# Altium PCB PCB1.PcbDoc (part 9 of 12)
Units mm, origin at the board's own origin, x right, y up, seen from the top; angles counter-clockwise.
Board outline 100 x 100 mm, 6 copper layers (Top Layer, Int1 (GND), Int2 (Sign), Int3 (Sign), Int4 (PWR), Bottom Layer), stack 1.538 mm thick; 614 components, 712 nets, 3014 pads, 1096 vias.
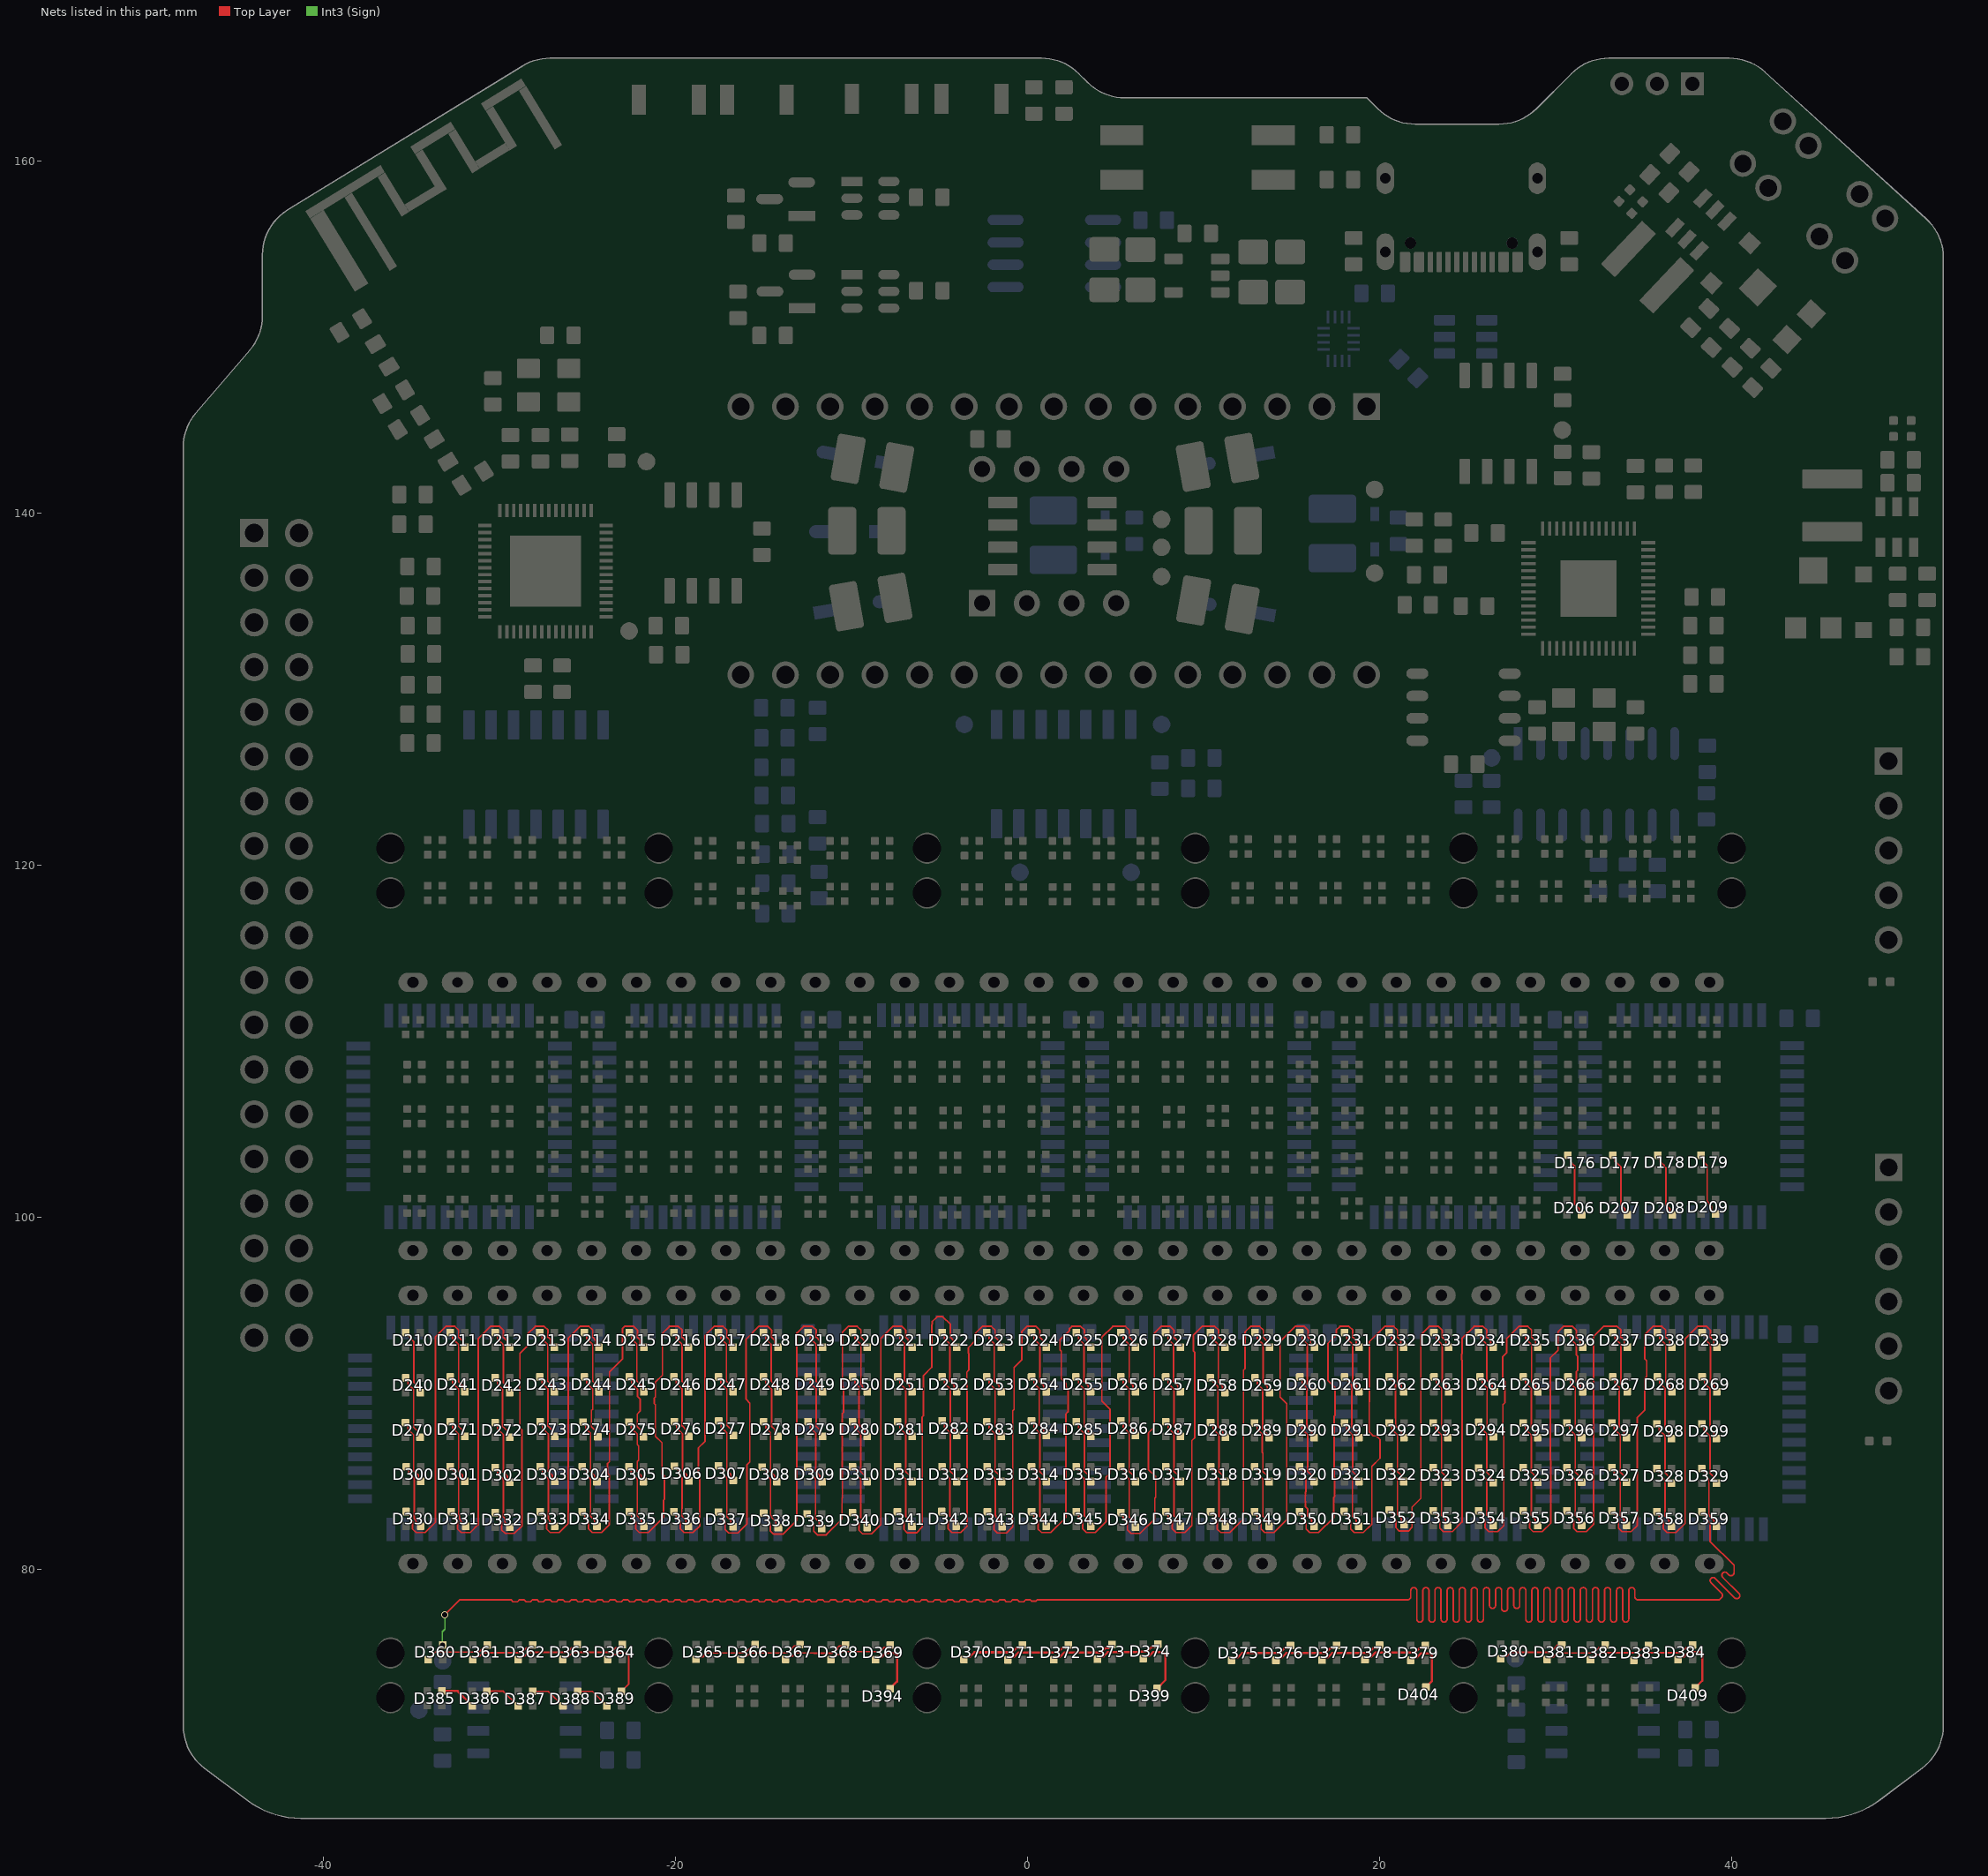
[diagram p12: the nets of this part, all layers, seen from the top]

## Via types
v1: diameter 0.4, hole 0.3, Top Layer to Bottom Layer, tented both sides, 1087 vias
v2: diameter 0.4, hole 0.3, Top Layer to Bottom Layer, 6 vias
v3: diameter 0.4, hole 0.3, Top Layer to Bottom Layer, tented top, 2 vias
v4: diameter 0.6, hole 0.5, Top Layer to Bottom Layer, 1 vias

## Nets (pads, with @x,y where several pads share a name; then routed paths per layer and width w, separated by ;. In a path a pad name is that pad's centre, name@x,y a point inside that pad or via, vN(x,y) a via of type N, cw(c..) or ccw(c..) an arc to the next point about the centre after c; other vN are vias at no path point) (continued)
NetD176_1: D176.1 D206.4 | length 3.7
  Top Layer w0.09: D176.1@30.69,103.523 30.827,103.385 30.827,103.171 31.063,102.935 31.063,100.763 31.332,100.494 31.332,100.313 D206.4@31.465,100.18
NetD177_1: D177.1 D207.4 | length 3.7
  Top Layer w0.09: D177.1@33.24,103.523 33.377,103.385 33.377,103.171 33.703,102.846 33.703,100.717 33.925,100.494 33.925,100.282 D207.4@34.027,100.18
NetD178_1: D178.1 D208.4 | length 3.7
  Top Layer w0.09: D178.1@35.79,103.533 35.927,103.395 35.927,103.181 36.07,103.039 36.15,102.959 36.15,102.904 36.26,102.794 36.26,100.717 36.482,100.494 36.482,100.285 D208.4@36.577,100.19
NetD179_1: D179.1 D209.4 | length 3.7
  Top Layer w0.09: D179.1@38.24,103.533 38.377,103.395 38.377,103.181 38.6,102.959 38.6,100.932 38.71,100.822 38.71,100.767 38.84,100.637 38.84,100.423 39.027,100.235 D209.4@39.027,100.19
NetD210_1: D210.1 D240.4 | length 3.7
  Top Layer w0.09: D210.1@-35.332,93.436 -35.067,93.171 -35.067,93.116 -34.877,92.926 -34.877,90.627 -34.655,90.404 -34.655,90.219 D240.4@-34.494,90.058
NetD211_1: D211.1 D241.4 | length 3.8
  Top Layer w0.09: D211.1@-32.847,93.431 -32.82,93.431 -32.67,93.281 -32.67,93.099 -32.337,92.767 -32.337,90.677 -32.115,90.454 -32.115,90.238 D241.4@-31.93,90.053
NetD211_3: D211.4 D330.1 | length 15.9
  Top Layer w0.09: D330.1@-35.324,83.288 -35.044,83.008 -35.044,82.794 -34.964,82.714 -34.964,82.312 -34.75,82.098 -34.238,82.098 -33.651,82.685 -33.651,93.224 -33.064,93.811 -32.551,93.811 -32.337,93.597 -32.337,93.195 -32.115,92.972 -32.115,92.791 D211.4@-32.141,92.765
NetD212_1: D212.1 D242.4 | length 3.8
  Top Layer w0.09: D212.1@-30.347,93.381 -30.23,93.381 -30.13,93.281 -30.13,93.099 -29.797,92.767 -29.797,90.627 -29.575,90.404 -29.575,90.148 D242.4@-29.43,90.003
NetD212_3: D212.4 D331.1 | length 15.9
  Top Layer w0.09: D331.1@-32.76,83.283 -32.48,83.003 -32.48,82.789 -32.4,82.709 -32.4,82.307 -32.187,82.093 -31.674,82.093 -31.227,82.54 -31.227,93.107 -30.524,93.811 -30.011,93.811 -29.797,93.597 -29.797,93.195 -29.575,92.972 -29.575,92.768 D212.4@-29.583,92.76
NetD213_1: D213.1 D243.4 | length 3.8
  Top Layer w0.09: D213.1@-27.797,93.431 -27.74,93.431 -27.59,93.281 -27.59,93.099 -27.273,92.782 -27.273,90.692 -27.035,90.454 -27.035,90.208 D243.4@-26.88,90.053
NetD213_3: D213.4 D332.1 | length 16.1
  Top Layer w0.09: D332.1@-30.26,83.233 -29.98,82.953 -29.98,82.739 -29.9,82.659 -29.9,82.257 -29.687,82.043 -29.174,82.043 -28.738,82.479 -28.738,87.915 -28.851,88.029 -28.851,88.637 -28.85,88.638 -28.85,90.403 -28.853,90.405 -28.853,92.268 -28.418,92.703 -28.418,93.376 -27.984,93.811 -27.471,93.811 -27.257,93.597 -27.257,93.195 -27.083,93.02 D213.4@-27.083,92.71
NetD214_1: D214.1 D244.4 | length 3.5
  Top Layer w0.09: D214.1@-25.12,93.351 -25.05,93.281 -25.05,93.099 -24.723,92.772 -24.723,90.682 -24.495,90.454 -24.495,90.098 D244.4@-24.48,90.083
NetD214_3: D214.4 D333.1 | length 15.9
  Top Layer w0.09: D333.1@-27.71,83.283 -27.43,83.003 -27.43,82.789 -27.35,82.709 -27.35,82.654 -27.338,82.642 -27.338,82.295 -27.137,82.093 -26.624,82.093 -26.102,82.615 -26.102,93.153 -25.444,93.811 -24.931,93.811 -24.717,93.597 -24.717,93.195 -24.533,93.01 D214.4@-24.533,92.76
NetD215_1: D215.1 D245.4 | length 3.8
  Top Layer w0.09: D215.1@-22.747,93.461 -22.69,93.461 -22.51,93.281 -22.51,93.099 -22.207,92.797 -22.207,90.707 -21.955,90.454 -21.955,90.208 D245.4@-21.83,90.083
NetD215_3: D215.4 D334.1 | length 16
  Top Layer w0.09: D334.1@-25.31,83.283 -25.173,83.145 -25.173,82.931 -24.95,82.709 -24.95,82.307 -24.737,82.093 -24.224,82.093 -23.783,82.534 -23.783,85.373 -23.877,85.467 -23.877,86.016 -23.77,86.123 -23.77,91.213 -23.031,91.952 -23.031,93.683 -22.904,93.811 -22.391,93.811 -22.177,93.597 -22.177,93.195 -22.017,93.035 D215.4@-22.017,92.76
NetD216_1: D216.1 D246.4 | length 3.7
  Top Layer w0.09: D216.1@-20.154,93.498 -19.97,93.313 -19.97,93.099 -19.637,92.767 -19.637,90.677 -19.415,90.454 -19.415,90.241 D246.4@-19.294,90.12
NetD216_3: D216.4 D335.1 | length 16.4
  Top Layer w0.09: D335.1@-22.647,83.283 -22.51,83.145 -22.51,82.931 -22.275,82.697 -22.275,82.295 -22.074,82.093 -21.561,82.093 -20.697,82.957 -20.697,83.932 -20.641,83.988 -20.641,85.297 -20.785,85.442 -20.785,87.199 -21.157,87.571 -21.157,89.358 -21.223,89.424 -21.223,89.732 -21.157,89.798 -21.157,90.638 -20.76,91.035 -20.76,93.414 -20.364,93.811 -19.851,93.811 -19.637,93.597 -19.637,93.195 -19.447,93.005 D216.4@-19.447,92.76
NetD217_1: D217.1 D247.4 | length 3.8
  Top Layer w0.09: D217.1@-17.638,93.522 -17.43,93.313 -17.43,93.099 -17.123,92.792 -17.123,90.702 -16.875,90.454 -16.875,90.273 -16.746,90.144 D247.4@-16.734,90.144
NetD217_3: D217.4 D336.1 | length 15.9
  Top Layer w0.09: D336.1@-20.11,83.283 -19.973,83.145 -19.973,82.931 -19.738,82.697 -19.738,82.295 -19.536,82.093 -19.024,82.093 -18.634,82.483 -18.634,85.353 -18.717,85.436 -18.717,86.9 -18.345,87.272 -18.345,93.289 -17.824,93.811 -17.311,93.811 -17.097,93.597 -17.097,93.195 -16.933,93.03 D217.4@-16.933,92.76
NetD218_1: D218.1 D248.4 | length 3.8
  Top Layer w0.09: D218.1@-15.172,93.448 -15.057,93.448 -14.89,93.281 -14.89,93.099 -14.58,92.789 -14.58,90.699 -14.335,90.454 -14.335,90.15 D248.4@-14.255,90.07
NetD218_3: D218.4 D337.1 | length 16.1
  Top Layer w0.09: D337.1@-17.567,83.26 -17.339,83.032 -17.287,82.98 -17.287,82.766 -17.195,82.674 -17.195,82.272 -16.994,82.07 -16.481,82.07 -15.952,82.599 -15.952,85.958 -15.793,86.118 -15.793,89.451 -16.005,89.663 -16.005,93.089 -15.284,93.811 -14.771,93.811 -14.557,93.597 -14.557,93.195 -14.39,93.027 D218.4@-14.39,92.737
NetD219_1: D219.1 D249.4 | length 3.8
  Top Layer w0.09: D219.1@-12.6,93.453 -12.522,93.453 -12.35,93.281 -12.35,93.099 -12.018,92.768 -12.018,90.677 -11.795,90.454 -11.795,90.241 D249.4@-11.683,90.128
NetD219_3: D219.4 D338.1 | length 16.1
  Top Layer w0.09: D338.1@-15.006,83.194 -14.726,82.914 -14.726,82.7 -14.634,82.608 -14.634,82.206 -14.432,82.004 -13.92,82.004 -13.121,82.802 -13.121,87.898 -13.119,87.899 -13.119,93.435 -12.744,93.811 -12.231,93.811 -12.017,93.597 -12.017,93.195 -11.828,93.005 D219.4@-11.828,92.671
NetD220_1: D220.1 D250.4 | length 3.8
  Top Layer w0.09: D220.1@-10.047,93.461 -9.99,93.461 -9.81,93.281 -9.81,93.099 -9.477,92.767 -9.477,90.518 -9.397,90.438 -9.397,90.383 D250.4@-9.13,90.116
NetD220_3: D220.4 D339.1 | length 16.2
  Top Layer w0.09: D339.1@-12.534,83.157 -12.254,82.877 -12.254,82.663 -12.162,82.571 -12.162,82.169 -11.96,81.967 -11.448,81.967 -10.551,82.864 -10.551,84.055 -10.529,84.076 -10.529,85.267 -10.547,85.285 -10.547,88.838 -10.469,88.917 -10.469,90.329 -10.534,90.395 -10.534,93.48 -10.204,93.811 -9.691,93.811 -9.477,93.597 -9.477,93.195 -9.287,93.005 D220.4@-9.287,92.634
NetD221_1: D221.1 D251.4 | length 3.8
  Top Layer w0.09: D221.1@-7.494,93.461 -7.45,93.461 -7.27,93.281 -7.27,93.099 -7.009,92.838 -7.009,90.748 -6.715,90.454 -6.715,90.241 D251.4@-6.577,90.103
NetD221_3: D221.4 D340.1 | length 16
  Top Layer w0.09: D340.1@-9.964,83.217 -9.684,82.937 -9.684,82.723 -9.592,82.631 -9.592,82.229 -9.39,82.027 -8.878,82.027 -8.348,82.556 -8.348,93.126 -7.664,93.811 -7.151,93.811 -6.937,93.597 -6.937,93.195 -6.786,93.044 D221.4@-6.786,92.694
NetD222_1: D222.1 D252.4 | length 3.8
  Top Layer w0.09: D222.1@-4.954,93.461 -4.91,93.461 -4.73,93.281 -4.73,93.099 -4.423,92.792 -4.423,90.702 -4.175,90.454 -4.175,90.221 D252.4@-4.037,90.083
NetD222_3: D222.4 D341.1 | length 16.9
  Top Layer w0.09: D341.1@-7.41,83.273 -7.13,82.993 -7.13,82.779 -7.038,82.687 -7.038,82.285 -6.836,82.083 -6.324,82.083 -5.99,82.417 -5.99,87.903 -6.006,87.919 -6.006,88.659 -5.924,88.741 -5.924,91.018 -5.454,91.488 -5.454,93.909 -5.423,93.94 -5.423,94.091 -5.15,94.365 -4.842,94.365 -4.397,93.921 -4.397,93.195 -4.233,93.03 D222.4@-4.233,92.75
NetD223_1: D223.1 D253.4 | length 3.8
  Top Layer w0.09: D223.1@-2.397,93.461 -2.37,93.461 -2.19,93.281 -2.19,93.099 -1.908,92.817 -1.908,90.727 -1.635,90.454 -1.635,90.238 D253.4@-1.48,90.083
NetD223_3: D223.4 D342.1 | length 16.1
  Top Layer w0.09: D342.1@-4.895,83.288 -4.615,83.008 -4.615,82.794 -4.523,82.702 -4.523,82.3 -4.322,82.098 -3.809,82.098 -3.45,82.457 -3.45,90.446 -3.465,90.46 -3.465,91.211 -3.352,91.323 -3.352,92.269 -3.374,92.291 -3.374,92.599 -2.979,92.994 -2.979,93.416 -2.584,93.811 -2.071,93.811 -1.857,93.597 -1.857,93.195 -1.581,92.918 -1.581,92.704 D223.4@-1.497,92.621
NetD224_1: D224.1 D254.4 | length 3.8
  Top Layer w0.09: D224.1@0.126,93.461 0.17,93.461 0.35,93.281 0.35,93.099 0.683,92.767 0.683,90.677 0.905,90.454 0.905,90.221 D254.4@1.043,90.083
NetD224_3: D224.4 D343.1 | length 15.9
  Top Layer w0.09: D343.1@-2.295,83.268 -2.03,83.003 -2.015,82.988 -2.015,82.774 -1.923,82.682 -1.923,82.28 -1.721,82.078 -1.209,82.078 -0.855,82.432 -0.855,89.021 -0.782,89.094 -0.782,91.482 -0.336,91.927 -0.336,93.518 -0.044,93.811 0.469,93.811 0.683,93.597 0.683,93.195 0.905,92.972 D224.4@0.905,92.768
NetD225_1: D225.1 D255.4 | length 3.8
  Top Layer w0.09: D225.1@2.666,93.461 2.71,93.461 2.89,93.281 2.89,93.099 3.2,92.789 3.2,90.686 3.432,90.454 3.432,90.234 D255.4@3.583,90.083
NetD225_3: D225.4 D344.1 | length 16.3
  Top Layer w0.09: D344.1@0.213,83.283 0.35,83.145 0.35,82.931 0.585,82.697 0.585,82.295 0.786,82.093 1.299,82.093 2.166,82.96 2.166,88.838 2.288,88.961 2.288,90.26 2.184,90.364 2.184,90.552 1.904,90.832 1.904,92.404 1.832,92.476 1.832,93.043 2.373,93.584 2.373,93.688 2.496,93.811 3.009,93.811 3.223,93.597 3.223,93.195 3.39,93.027 D225.4@3.39,92.76
NetD226_1: D226.1 D256.4 | length 3.8
  Top Layer w0.09: D226.1@5.206,93.461 5.25,93.461 5.43,93.281 5.43,93.099 5.76,92.77 5.76,90.677 5.982,90.454 5.982,90.224 D256.4@6.123,90.083
NetD226_3: D226.4 D345.1 | length 16.4
  Top Layer w0.09: D345.1@2.753,83.283 2.89,83.145 2.89,82.931 3.125,82.697 3.125,82.295 3.326,82.093 3.839,82.093 4.442,82.696 4.442,85.233 4.678,85.469 4.678,89.1 4.213,89.564 4.213,93.195 4.829,93.811 5.036,93.811 5.549,93.811 5.763,93.597 5.763,93.195 5.95,93.008 D226.4@5.95,92.76
NetD227_1: D227.1 D257.4 | length 3.8
  Top Layer w0.09: D227.1@7.753,93.461 7.79,93.461 7.97,93.281 7.97,93.099 8.28,92.789 8.28,90.699 8.525,90.454 8.525,90.228 D257.4@8.67,90.083
NetD227_3: D227.4 D346.1 | length 16.3
  Top Layer w0.09: D346.1@5.293,83.233 5.43,83.095 5.43,82.881 5.665,82.647 5.665,82.245 5.866,82.043 6.379,82.043 7.221,82.885 7.221,84.058 7.264,84.101 7.264,85.274 6.85,85.688 6.85,87.752 7.19,88.092 7.19,93.424 7.576,93.811 8.089,93.811 8.303,93.597 8.303,93.195 8.47,93.027 D227.4@8.47,92.71
NetD228_1: D228.1 D258.4 | length 3.8
  Top Layer w0.09: D228.1@10.303,93.461 10.33,93.461 10.51,93.281 10.51,93.099 10.827,92.782 10.827,90.642 11.065,90.404 11.065,90.223 11.205,90.083 D258.4@11.22,90.083
NetD228_3: D228.4 D347.1 | length 16.1
  Top Layer w0.09: D347.1@7.84,83.283 7.977,83.145 7.977,82.931 8.212,82.697 8.212,82.295 8.413,82.093 8.926,82.093 9.324,82.491 9.324,87.326 9.493,87.495 9.493,92.33 9.418,92.405 9.418,93.322 9.907,93.811 10.629,93.811 10.843,93.597 10.843,93.195 11.017,93.02 D228.4@11.017,92.76
NetD229_1: D229.1 D259.4 | length 3.8
  Top Layer w0.09: D229.1@12.803,93.461 12.87,93.461 13.05,93.281 13.05,93.099 13.377,92.772 13.377,90.632 13.605,90.404 13.605,90.198 D259.4@13.72,90.083
NetD229_3: D229.4 D348.1 | length 15.9
  Top Layer w0.09: D348.1@10.39,83.283 10.67,83.003 10.67,82.789 10.762,82.697 10.762,82.295 10.963,82.093 11.476,82.093 12.253,82.87 12.253,91.318 12.344,91.409 12.344,93.498 12.656,93.811 13.169,93.811 13.383,93.597 13.383,93.195 13.567,93.01 D229.4@13.567,92.76
NetD230_1: D230.1 D260.4 | length 3.7
  Top Layer w0.09: D230.1@15.41,93.461 15.59,93.281 15.59,93.099 15.877,92.812 15.877,90.563 16.003,90.438 16.003,90.383 16.045,90.341 D260.4@16.27,90.116
NetD230_3: D230.4 D349.1 | length 16.4
  Top Layer w0.09: D349.1@12.89,83.283 13.027,83.145 13.027,82.931 13.262,82.697 13.262,82.295 13.463,82.093 13.976,82.093 14.711,82.828 14.711,89.416 14.338,89.789 14.338,92.952 15.196,93.811 15.709,93.811 15.923,93.597 15.923,93.195 16.067,93.05 16.067,92.836 D230.4@16.283,92.621
NetD231_1: D231.1 D261.4 | length 3.8
  Top Layer w0.09: D231.1@17.903,93.461 17.95,93.461 18.13,93.281 18.13,93.099 18.463,92.767 18.463,90.709 18.463,90.677 18.685,90.454 18.685,90.218 D261.4@18.82,90.083
NetD231_3: D231.4 D350.1 | length 16.2
  Top Layer w0.09: D350.1@15.44,83.283 15.577,83.145 15.577,82.931 15.812,82.697 15.812,82.295 16.013,82.093 16.526,82.093 17.388,82.955 17.388,84.088 17.427,84.127 17.427,85.261 17.403,85.285 17.403,86.624 17.407,86.629 17.407,87.968 17.403,87.973 17.403,88.69 17.454,88.741 17.454,90.347 17.051,90.749 17.051,92.838 17.527,93.313 17.527,93.601 17.736,93.811 18.249,93.811 18.463,93.597 18.463,93.195 18.653,93.005 D231.4@18.653,92.76
NetD232_1: D232.1 D262.4 | length 3.8
  Top Layer w0.09: D232.1@20.446,93.461 20.49,93.461 20.67,93.281 20.67,93.099 21.003,92.767 21.003,90.712 21.003,90.677 21.225,90.454 21.225,90.221 D262.4@21.363,90.083
NetD232_3: D232.4 D351.1 | length 16.5
  Top Layer w0.09: D351.1@17.975,83.288 18.255,83.008 18.255,82.794 18.347,82.702 18.347,82.3 18.548,82.098 19.061,82.098 19.546,82.583 19.546,85.853 20.012,86.32 20.012,87.377 19.8,87.589 19.62,87.589 19.402,87.807 19.402,89.517 19.413,89.528 19.413,92.947 20.276,93.811 20.789,93.811 21.003,93.597 21.003,93.195 21.193,93.005 D232.4@21.193,92.765
NetD233_1: D233.1 D263.4 | length 3.8
  Top Layer w0.09: D233.1@22.953,93.421 23.07,93.421 23.21,93.281 23.21,93.099 23.543,92.767 23.543,90.677 23.765,90.454 23.765,90.148 D263.4@23.87,90.043
NetD233_3: D233.4 D352.1 | length 16
  Top Layer w0.09: D352.1@20.54,83.373 20.82,83.093 20.82,82.879 20.912,82.787 20.912,82.385 21.113,82.183 21.626,82.183 21.833,82.39 21.833,83.541 22.332,84.04 22.332,93.326 22.816,93.811 23.329,93.811 23.543,93.597 23.543,93.195 23.765,92.972 23.765,92.781 D233.4@23.925,92.621
NetD234_1: D234.1 D264.4 | length 3.8
  Top Layer w0.09: D234.1@25.526,93.406 25.625,93.406 25.75,93.281 25.75,93.099 26.083,92.767 26.083,90.754 26.382,90.454 26.382,90.089 D264.4@26.443,90.028
NetD234_3: D234.4 D353.1 | length 16.1
  Top Layer w0.09: D353.1@23.04,83.333 23.32,83.053 23.32,82.839 23.412,82.747 23.412,82.345 23.613,82.143 24.126,82.143 24.674,82.691 24.674,91.889 24.649,91.914 24.649,92.222 24.674,92.247 24.674,93.128 25.356,93.811 25.869,93.811 26.083,93.597 26.083,93.195 26.305,92.972 26.305,92.759 D234.4@26.443,92.621
NetD235_1: D235.1 D265.4 | length 3.6
  Top Layer w0.09: D235.1@28.15,93.421 28.29,93.281 28.29,93.099 28.623,92.767 28.623,90.677 28.845,90.454 28.845,90.241 D265.4@28.97,90.116
NetD235_3: D235.4 D354.1 | length 16.2
  Top Layer w0.09: D354.1@25.613,83.333 25.893,83.053 25.893,82.839 25.985,82.747 25.985,82.345 26.186,82.143 26.699,82.143 27.042,82.486 27.042,88.069 26.991,88.121 26.991,89.36 27.107,89.476 27.107,90.691 26.988,90.81 26.988,92.101 27.211,92.325 27.211,93.126 27.896,93.811 28.409,93.811 28.623,93.597 28.623,93.195 28.845,92.972 28.845,92.734 D235.4@28.958,92.621
NetD236_1: D236.1 D266.4 | length 3.9
  Top Layer w0.09: D236.1@30.553,93.421 30.69,93.421 30.83,93.281 30.83,93.099 31.163,92.767 31.163,92.195 31.25,92.108 31.25,91.321 31.163,91.234 31.163,90.677 31.385,90.454 31.385,90.128 D266.4@31.47,90.043
NetD236_3: D236.4 D355.1 | length 16.1
  Top Layer w0.09: D355.1@28.14,83.333 28.42,83.053 28.42,82.839 28.512,82.747 28.512,82.345 28.713,82.143 29.226,82.143 29.72,82.637 29.72,86.19 29.686,86.224 29.686,92.013 30.124,92.451 30.124,93.498 30.436,93.811 30.949,93.811 31.163,93.597 31.163,93.195 31.385,92.972 31.385,92.759 D236.4@31.523,92.621
NetD237_1: D237.1 D267.4 | length 3.7
  Top Layer w0.09: D237.1@33.103,93.421 33.23,93.421 33.37,93.281 33.37,93.099 33.703,92.767 33.703,90.518 33.783,90.438 33.783,90.383 D267.4@34.02,90.146
NetD237_3: D237.4 D356.1 | length 16
  Top Layer w0.09: D356.1@30.64,83.333 30.92,83.053 30.92,82.839 31.012,82.747 31.012,82.345 31.213,82.143 31.726,82.143 32.152,82.569 32.152,93.253 32.257,93.358 32.476,93.577 32.71,93.811 33.489,93.811 33.703,93.597 33.703,93.195 33.893,93.005 D237.4@33.893,92.81
NetD238_1: D238.1 D268.4 | length 3.7
  Top Layer w0.09: D238.1@35.653,93.371 35.82,93.371 35.91,93.281 35.91,93.099 36.243,92.767 36.243,90.677 36.465,90.454 36.465,90.241 D268.4@36.57,90.136
NetD238_3: D238.4 D357.1 | length 16.2
  Top Layer w0.09: D357.1@33.19,83.333 33.47,83.053 33.47,82.839 33.562,82.747 33.562,82.345 33.763,82.143 34.276,82.143 34.631,82.498 34.631,88.64 35.057,89.065 35.057,90.854 35.167,90.964 35.167,91.855 35.06,91.961 35.06,92.206 35.057,92.209 35.057,93.351 35.516,93.811 36.029,93.811 36.243,93.597 36.243,93.195 36.465,92.972 36.465,92.759 D238.4@36.603,92.621
NetD239_1: D239.1 D269.4 | length 3.7
  Top Layer w0.09: D239.1@38.313,93.451 38.593,93.171 38.593,92.957 38.783,92.767 38.783,90.677 39.005,90.454 39.005,90.241 D269.4@39.12,90.126
NetD239_3: D239.4 D358.1 | length 15.9
  Top Layer w0.09: D358.1@35.74,83.283 35.877,83.145 35.877,82.931 36.112,82.697 36.112,82.295 36.313,82.093 36.826,82.093 37.344,82.611 37.344,93.099 38.056,93.811 38.569,93.811 38.783,93.597 38.783,93.195 38.973,93.005 D239.4@38.973,92.76
NetD240_1: D240.1 D270.4 | length 3.6
  Top Layer w0.09: D240.1@-35.324,90.888 -35.21,90.773 -35.21,90.531 -34.89,90.212 -34.89,88.077 -34.668,87.854 -34.668,87.673 D270.4@-34.594,87.673
NetD241_1: D241.1 D271.4 | length 3.5
  Top Layer w0.09: D241.1@-32.757,90.883 -32.67,90.795 -32.67,90.581 -32.34,90.252 -32.34,88.127 -32.118,87.904 -32.118,87.723 -32.063,87.668 D271.4@-32.03,87.668
NetD242_1: D242.1 D272.4 | length 3.5
  Top Layer w0.09: D242.1@-30.222,90.833 -30.13,90.74 -30.13,90.531 -29.843,90.245 -29.843,88.13 -29.568,87.854 -29.568,87.656 D272.4@-29.53,87.618
NetD243_1: D243.1 D273.4 | length 3.5
  Top Layer w0.09: D243.1@-27.677,90.883 -27.59,90.795 -27.59,90.581 -27.257,90.249 -27.257,88.144 -27.018,87.904 -27.018,87.706 D273.4@-26.98,87.668
NetD244_1: D244.1 D274.4 | length 3.5
  Top Layer w0.09: D244.1@-25.192,90.913 -25.05,90.77 -25.05,90.581 -24.721,90.253 -24.721,89.101 -24.79,89.031 -24.79,88.117 -24.568,87.894 -24.568,87.71 D274.4@-24.58,87.698
NetD245_1: D245.1 D275.4 | length 3.7
  Top Layer w0.09: D245.1@-22.627,90.913 -22.51,90.795 -22.51,90.581 -22.177,90.249 -22.177,89.847 -22.029,89.698 -22.029,88.988 -22.19,88.826 -22.19,88.117 -21.968,87.894 -21.968,87.713 -21.953,87.698 D275.4@-21.93,87.698
NetD246_1: D246.1 D276.4 | length 3.5
  Top Layer w0.09: D246.1@-20.078,90.95 -19.97,90.841 -19.97,90.581 -19.637,90.249 -19.637,88.158 -19.396,87.916 -19.396,87.735 D276.4@-19.348,87.734
NetD247_1: D247.1 D277.4 | length 3.5
  Top Layer w0.09: D247.1@-17.564,90.974 -17.43,90.839 -17.43,90.581 -17.097,90.249 -17.097,88.184 -16.868,87.954 -16.868,87.773 -16.854,87.759 D277.4@-16.834,87.759
NetD248_1: D248.1 D278.4 | length 3.5
  Top Layer w0.09: D248.1@-15.027,90.9 -14.89,90.763 -14.89,90.581 -14.557,90.249 -14.557,88.144 -14.355,87.941 D278.4@-14.355,87.685
NetD249_1: D249.1 D279.4 | length 3.5
  Top Layer w0.09: D249.1@-12.513,90.905 -12.492,90.905 -12.35,90.763 -12.35,90.581 -12.017,90.249 -12.017,88.127 -11.795,87.904 -11.795,87.702 D279.4@-11.783,87.69
NetD250_1: D250.1 D280.4 | length 3.5
  Top Layer w0.09: D250.1@-9.927,90.913 -9.81,90.795 -9.81,90.581 -9.587,90.359 -9.587,88.224 -9.268,87.904 -9.268,87.723 -9.243,87.698 D280.4@-9.23,87.698
NetD251_1: D251.1 D281.4 | length 3.5
  Top Layer w0.09: D251.1@-7.387,90.913 -7.27,90.795 -7.27,90.581 -6.937,90.249 -6.937,88.127 -6.715,87.904 -6.715,87.723 -6.69,87.698 D281.4@-6.677,87.698
NetD252_1: D252.1 D282.4 | length 3.5
  Top Layer w0.09: D252.1@-4.847,90.913 -4.73,90.795 -4.73,90.581 -4.397,90.249 -4.397,88.177 -4.175,87.954 -4.175,87.735 D282.4@-4.137,87.698
NetD253_1: D253.1 D283.4 | length 3.5
  Top Layer w0.09: D253.1@-2.31,90.913 -2.19,90.792 -2.19,90.581 -1.857,90.249 -1.857,88.127 -1.635,87.904 -1.635,87.723 -1.61,87.698 D283.4@-1.58,87.698
NetD254_1: D254.1 D284.4 | length 3.5
  Top Layer w0.09: D254.1@0.233,90.913 0.35,90.795 0.35,90.581 0.655,90.277 0.655,88.205 0.905,87.954 0.905,87.735 D284.4@0.943,87.698
NetD255_1: D255.1 D285.4 | length 3.5
  Top Layer w0.09: D255.1@2.76,90.913 2.877,90.795 2.877,90.581 3.21,90.249 3.21,88.14 3.445,87.904 3.445,87.723 3.47,87.698 D285.4@3.483,87.698
NetD256_1: D256.1 D286.4 | length 3.5
  Top Layer w0.09: D256.1@5.31,90.913 5.427,90.795 5.427,90.581 5.76,90.249 5.76,88.18 5.985,87.954 5.985,87.735 D286.4@6.023,87.698
NetD257_1: D257.1 D287.4 | length 3.5
  Top Layer w0.09: D257.1@7.853,90.913 7.97,90.795 7.97,90.581 8.303,90.249 8.303,88.134 8.532,87.904 8.532,87.723 8.557,87.698 D287.4@8.57,87.698
NetD258_1: D258.1 D288.4 | length 3.5
  Top Layer w0.09: D258.1@10.39,90.913 10.39,90.866 10.543,90.713 10.543,90.658 10.805,90.396 10.805,88.121 10.927,87.998 10.993,87.932 11.029,87.932 11.082,87.879 11.082,87.728 11.112,87.698 D288.4@11.12,87.698
NetD259_1: D259.1 D289.4 | length 3.5
  Top Layer w0.09: D259.1@12.89,90.906 13.05,90.745 13.05,90.531 13.351,90.23 13.351,87.966 D289.4@13.62,87.698
NetD260_1: D260.1 D290.4 | length 3.5
  Top Layer w0.09: D260.1@15.44,90.913 15.59,90.763 15.59,90.581 15.813,90.359 15.813,90.304 15.855,90.262 15.855,88.121 15.977,87.998 16.043,87.932 16.079,87.932 16.132,87.879 16.132,87.728 16.162,87.698 D290.4@16.17,87.698
NetD261_1: D261.1 D291.4 | length 3.6
  Top Layer w0.09: D261.1@17.99,90.913 18.013,90.913 18.163,90.763 18.163,90.74 18.273,90.63 18.273,90.598 18.405,90.466 18.405,88.121 18.527,87.998 18.593,87.932 18.629,87.932 18.682,87.879 18.682,87.728 18.712,87.698 D291.4@18.72,87.698
NetD262_1: D262.1 D292.4 | length 3.5
  Top Layer w0.09: D262.1@20.533,90.913 20.553,90.913 20.703,90.763 20.703,90.743 20.813,90.633 20.813,90.598 20.893,90.518 20.893,88.586 20.9,88.579 20.9,88.169 21.07,87.998 21.225,87.843 21.225,87.735 D292.4@21.263,87.698
NetD263_1: D263.1 D293.4 | length 3.5
  Top Layer w0.09: D263.1@23.127,90.873 23.21,90.79 23.21,90.581 23.51,90.282 23.51,88.067 23.732,87.844 23.732,87.663 23.737,87.658 D293.4@23.77,87.658
NetD264_1: D264.1 D294.4 | length 3.5
  Top Layer w0.09: D264.1@25.732,90.858 25.827,90.763 25.827,90.581 26.095,90.314 26.095,88.105 26.317,87.883 26.317,87.668 D294.4@26.343,87.643
NetD265_1: D265.1 D295.4 | length 3.5
  Top Layer w0.09: D265.1@28.18,90.873 28.29,90.763 28.29,90.581 28.61,90.262 28.61,88.067 28.832,87.844 28.832,87.663 28.837,87.658 D295.4@28.87,87.658
NetD266_1: D266.1 D296.4 | length 3.5
  Top Layer w0.09: D266.1@30.753,90.873 30.83,90.795 30.83,90.581 31.11,90.302 31.11,88.067 31.332,87.844 31.332,87.663 31.337,87.658 D296.4@31.37,87.658
NetD267_1: D267.1 D297.4 | length 3.5
  Top Layer w0.09: D267.1@33.293,90.873 33.37,90.795 33.37,90.581 33.593,90.359 33.593,88.134 33.882,87.844 33.882,87.663 33.887,87.658 D297.4@33.92,87.658
NetD268_1: D268.1 D298.4 | length 3.5
  Top Layer w0.09: D268.1@35.852,90.823 35.91,90.765 35.91,90.581 36.21,90.282 36.21,88.017 36.432,87.794 36.432,87.613 36.437,87.608 D298.4@36.47,87.608
NetD269_1: D269.1 D299.4 | length 3.5
  Top Layer w0.09: D269.1@38.423,90.823 38.45,90.795 38.45,90.581 38.76,90.272 38.76,88.017 38.982,87.794 38.982,87.613 38.987,87.608 D299.4@39.02,87.608
NetD270_1: D270.1 D300.4 | length 3.6
  Top Layer w0.09: D270.1@-35.324,88.363 -35.223,88.261 -35.223,87.981 -34.89,87.649 -34.89,85.618 -34.621,85.348 -34.621,85.085 D300.4@-34.6,85.065
NetD271_1: D271.1 D301.4 | length 3.6
  Top Layer w0.09: D271.1@-32.76,88.358 -32.673,88.27 -32.673,88.031 -32.34,87.699 -32.34,85.577 -32.118,85.354 -32.118,85.141 D301.4@-32.037,85.059
NetD272_1: D272.1 D302.4 | length 3.6
  Top Layer w0.09: D272.1@-30.235,88.308 -30.123,88.195 -30.123,87.981 -29.79,87.649 -29.79,85.527 -29.568,85.304 -29.568,85.041 D302.4@-29.536,85.009
NetD273_1: D273.1 D303.4 | length 3.6
  Top Layer w0.09: D273.1@-27.71,88.358 -27.573,88.22 -27.573,88.031 -27.24,87.699 -27.24,85.577 -27.018,85.354 -27.018,85.091 D303.4@-26.986,85.059
NetD274_1: D274.1 D304.4 | length 3.6
  Top Layer w0.09: D274.1@-25.31,88.388 -25.308,88.388 -25.123,88.203 -25.123,88.021 -24.84,87.739 -24.84,85.622 -24.84,85.567 -24.618,85.344 -24.618,85.121 D304.4@-24.586,85.089
NetD275_1: D275.1 D305.4 | length 3.7
  Top Layer w0.09: D275.1@-22.66,88.388 -22.523,88.25 -22.523,88.021 -22.19,87.689 -22.19,87.097 -22.11,87.017 -22.11,86.211 -22.19,86.131 -22.19,85.567 -21.968,85.344 -21.968,85.121 D305.4@-21.937,85.089
NetD276_1: D276.1 D306.4 | length 3.6
  Top Layer w0.09: D276.1@-20.078,88.425 -19.951,88.297 -19.951,88.043 -19.618,87.711 -19.618,85.668 -19.608,85.658 -19.608,85.604 -19.386,85.381 -19.386,85.158 D306.4@-19.355,85.126
NetD277_1: D277.1 D307.4 | length 3.6
  Top Layer w0.09: D277.1@-17.564,88.449 -17.423,88.307 -17.423,88.081 -17.094,87.753 -17.094,85.628 -16.872,85.406 -16.872,85.182 D307.4@-16.84,85.151
NetD278_1: D278.1 D308.4 | length 3.6
  Top Layer w0.09: D278.1@-15.035,88.375 -14.873,88.213 -14.873,88.031 -14.615,87.774 -14.615,85.554 -14.393,85.331 -14.393,85.108 D308.4@-14.361,85.077
NetD279_1: D279.1 D309.4 | length 3.6
  Top Layer w0.09: D279.1@-12.513,88.38 -12.35,88.217 -12.35,88.031 -12.043,87.725 -12.043,85.559 -11.821,85.337 -11.821,85.113 D309.4@-11.789,85.082
NetD280_1: D280.1 D310.4 | length 3.6
  Top Layer w0.09: D280.1@-9.96,88.388 -9.823,88.25 -9.823,88.031 -9.49,87.699 -9.49,85.567 -9.268,85.344 -9.268,85.121 D310.4@-9.237,85.089
NetD281_1: D281.1 D311.4 | length 3.6
  Top Layer w0.09: D281.1@-7.407,88.388 -7.27,88.25 -7.27,88.031 -6.937,87.699 -6.937,85.567 -6.715,85.344 -6.715,85.121 D311.4@-6.684,85.089
NetD282_1: D282.1 D312.4 | length 3.6
  Top Layer w0.09: D282.1@-4.867,88.388 -4.855,88.388 -4.73,88.263 -4.73,88.081 -4.397,87.749 -4.397,85.567 -4.175,85.344 -4.175,85.121 D312.4@-4.144,85.089
NetD283_1: D283.1 D313.4 | length 3.6
  Top Layer w0.09: D283.1@-2.31,88.388 -2.19,88.267 -2.19,88.031 -1.857,87.699 -1.857,85.638 -1.84,85.622 -1.84,85.567 -1.618,85.344 -1.618,85.121 D313.4@-1.586,85.089
NetD284_1: D284.1 D314.4 | length 3.6
  Top Layer w0.09: D284.1@0.213,88.388 0.225,88.388 0.35,88.263 0.35,88.081 0.683,87.749 0.683,85.567 0.905,85.344 0.905,85.121 D314.4@0.936,85.089
NetD285_1: D285.1 D315.4 | length 3.6
  Top Layer w0.09: D285.1@2.753,88.388 2.89,88.25 2.89,88.031 3.223,87.699 3.223,85.567 3.445,85.344 3.445,85.121 D315.4@3.476,85.089
NetD286_1: D286.1 D316.4 | length 3.6
  Top Layer w0.09: D286.1@5.293,88.388 5.305,88.388 5.43,88.263 5.43,88.081 5.763,87.749 5.763,85.567 5.985,85.344 5.985,85.121 D316.4@6.016,85.089
NetD287_1: D287.1 D317.4 | length 3.6
  Top Layer w0.09: D287.1@7.84,88.388 7.977,88.25 7.977,88.031 8.31,87.699 8.31,85.622 8.31,85.567 8.532,85.344 8.532,85.121 D317.4@8.564,85.089
NetD288_1: D288.1 D318.4 | length 3.6
  Top Layer w0.09: D288.1@10.39,88.388 10.527,88.25 10.527,87.981 10.86,87.649 10.86,85.567 11.082,85.344 11.082,85.121 D318.4@11.114,85.089
NetD289_1: D289.1 D319.4 | length 3.6
  Top Layer w0.09: D289.1@12.89,88.388 13.027,88.25 13.027,87.971 13.319,87.68 13.319,86.644 13.36,86.603 13.36,85.567 13.582,85.344 13.582,85.121 D319.4@13.613,85.089
NetD290_1: D290.1 D320.4 | length 3.6
  Top Layer w0.09: D290.1@15.44,88.388 15.577,88.25 15.577,87.971 15.91,87.639 15.91,85.567 16.132,85.344 16.132,85.121 D320.4@16.163,85.089
NetD291_1: D291.1 D321.4 | length 3.6
  Top Layer w0.09: D291.1@17.99,88.388 18.127,88.25 18.127,87.971 18.46,87.639 18.46,85.567 18.682,85.344 18.682,85.121 D321.4@18.713,85.089
NetD292_1: D292.1 D322.4 | length 3.6
  Top Layer w0.09: D292.1@20.533,88.388 20.677,88.243 20.677,87.971 21.003,87.646 21.003,85.567 21.225,85.344 21.225,85.121 D322.4@21.256,85.089
NetD293_1: D293.1 D323.4 | length 3.6
  Top Layer w0.09: D293.1@23.04,88.348 23.177,88.21 23.177,87.971 23.51,87.639 23.51,85.527 23.732,85.304 23.732,85.081 D323.4@23.764,85.049
NetD294_1: D294.1 D324.4 | length 3.6
  Top Layer w0.09: D294.1@25.621,88.333 25.763,88.191 25.763,88.01 26.083,87.69 26.083,85.512 26.305,85.29 26.305,85.066 D324.4@26.336,85.035
NetD295_1: D295.1 D325.4 | length 3.6
  Top Layer w0.09: D295.1@28.14,88.348 28.277,88.21 28.277,87.971 28.61,87.639 28.61,85.527 28.832,85.304 28.832,85.081 D325.4@28.863,85.049
NetD296_1: D296.1 D326.4 | length 3.6
  Top Layer w0.09: D296.1@30.64,88.348 30.777,88.21 30.777,87.971 31.11,87.639 31.11,85.527 31.332,85.304 31.332,85.081 D326.4@31.364,85.049
NetD297_1: D297.1 D327.4 | length 3.6
  Top Layer w0.09: D297.1@33.19,88.348 33.327,88.21 33.327,87.971 33.66,87.639 33.66,85.527 33.882,85.304 33.882,85.081 D327.4@33.914,85.049
NetD298_1: D298.1 D328.4 | length 3.6
  Top Layer w0.09: D298.1@35.74,88.298 35.877,88.16 35.877,87.921 36.21,87.589 36.21,85.477 36.432,85.254 36.432,85.031 D328.4@36.464,84.999
NetD299_1: D299.1 D329.4 | length 3.6
  Top Layer w0.09: D299.1@38.29,88.298 38.427,88.16 38.427,87.921 38.76,87.589 38.76,85.477 38.982,85.254 38.982,85.031 D329.4@39.013,84.999
NetD300_1: D300.1 D330.4 | length 3.7
  Top Layer w0.09: D300.1@-35.285,85.798 -35.176,85.689 -35.176,85.475 -34.854,85.154 -34.854,82.873 -34.774,82.793 -34.774,82.738 D330.4@-34.494,82.458
NetD301_1: D301.1 D331.4 | length 3.7
  Top Layer w0.09: D301.1@-32.76,85.783 -32.53,85.553 -32.53,85.339 -32.34,85.149 -32.34,83.131 -32.29,83.081 -32.29,82.868 -32.21,82.788 -32.21,82.733 D331.4@-31.93,82.453
NetD302_1: D302.1 D332.4 | length 3.7
  Top Layer w0.09: D302.1@-30.221,85.743 -30.123,85.645 -30.123,85.431 -29.79,85.099 -29.79,83.032 -29.79,82.977 -29.71,82.897 -29.71,82.683 D332.4@-29.43,82.403
NetD303_1: D303.1 D333.4 | length 3.7
  Top Layer w0.09: D303.1@-27.671,85.793 -27.573,85.695 -27.573,85.481 -27.24,85.149 -27.24,82.868 -27.16,82.788 -27.16,82.733 D333.4@-26.88,82.453
NetD304_1: D304.1 D334.4 | length 3.7
  Top Layer w0.09: D304.1@-25.31,85.823 -25.03,85.543 -25.03,85.329 -24.84,85.139 -24.84,83.027 -24.618,82.804 -24.618,82.621 D334.4@-24.48,82.483
NetD305_1: D305.1 D335.4 | length 3.7
  Top Layer w0.09: D305.1@-22.66,85.823 -22.523,85.685 -22.523,85.471 -22.19,85.139 -22.19,83.04 -21.955,82.804 -21.955,82.608 D335.4@-21.83,82.483
NetD306_1: D306.1 D336.4 | length 3.7
  Top Layer w0.09: D306.1@-20.078,85.86 -19.798,85.58 -19.798,85.366 -19.64,85.208 -19.64,83.455 -19.653,83.442 -19.653,83.134 -19.64,83.121 -19.64,83.027 -19.418,82.804 -19.418,82.623 -19.315,82.52 D336.4@-19.248,82.52
NetD307_1: D307.1 D337.4 | length 3.7
  Top Layer w0.09: D307.1@-17.564,85.884 -17.284,85.604 -17.284,85.39 -17.097,85.203 -17.097,83.004 -16.875,82.781 -16.875,82.6 -16.819,82.544 D337.4@-16.734,82.544
NetD308_1: D308.1 D338.4 | length 3.7
  Top Layer w0.09: D308.1@-15.085,85.81 -14.805,85.53 -14.805,85.316 -14.615,85.126 -14.615,83.072 -14.536,82.992 -14.536,82.937 -14.313,82.715 -14.313,82.528 D338.4@-14.255,82.47
NetD309_1: D309.1 D339.4 | length 3.8
  Top Layer w0.09: D309.1@-12.513,85.815 -12.233,85.535 -12.233,85.321 -12.064,85.152 -12.064,82.901 -11.842,82.678 -11.842,82.497 -11.82,82.475 D339.4@-11.683,82.475
NetD310_1: D310.1 D340.4 | length 3.7
  Top Layer w0.09: D310.1@-9.96,85.823 -9.68,85.543 -9.68,85.329 -9.494,85.142 -9.494,82.961 -9.414,82.881 -9.272,82.738 -9.272,82.557 -9.198,82.483 D340.4@-9.13,82.483
NetD311_1: D311.1 D341.4 | length 3.7
  Top Layer w0.09: D311.1@-7.407,85.823 -7.127,85.543 -7.127,85.329 -6.94,85.142 -6.94,83.017 -6.718,82.794 -6.718,82.613 -6.588,82.483 D341.4@-6.577,82.483
NetD312_1: D312.1 D342.4 | length 3.7
  Top Layer w0.09: D312.1@-4.867,85.823 -4.587,85.543 -4.587,85.329 -4.425,85.167 -4.425,83.087 -4.425,83.032 -4.203,82.809 -4.203,82.628 -4.058,82.483 D342.4@-4.037,82.483
NetD313_1: D313.1 D343.4 | length 3.7
  Top Layer w0.09: D313.1@-2.31,85.823 -2.047,85.56 -2.03,85.543 -2.03,85.329 -1.84,85.139 -1.84,83.082 -1.825,83.066 -1.825,83.012 -1.603,82.789 -1.603,82.606 D343.4@-1.48,82.483
NetD314_1: D314.1 D344.4 | length 3.7
  Top Layer w0.09: D314.1@0.213,85.823 0.493,85.543 0.493,85.329 0.683,85.139 0.683,83.027 0.905,82.804 0.905,82.621 D344.4@1.043,82.483
NetD315_1: D315.1 D345.4 | length 3.7
  Top Layer w0.09: D315.1@2.753,85.823 3.033,85.543 3.033,85.329 3.223,85.139 3.223,83.027 3.445,82.804 3.445,82.621 D345.4@3.583,82.483
NetD316_1: D316.1 D346.4 | length 3.7
  Top Layer w0.09: D316.1@5.293,85.823 5.573,85.543 5.573,85.329 5.763,85.139 5.763,82.977 5.985,82.754 5.985,82.573 6.075,82.483 D346.4@6.123,82.483
NetD317_1: D317.1 D347.4 | length 3.7
  Top Layer w0.09: D317.1@7.84,85.823 8.12,85.543 8.12,85.329 8.31,85.139 8.31,83.027 8.532,82.804 8.532,82.621 D347.4@8.67,82.483
NetD318_1: D318.1 D348.4 | length 3.7
  Top Layer w0.09: D318.1@10.39,85.823 10.67,85.543 10.67,85.329 10.86,85.139 10.86,83.082 10.86,83.027 11.082,82.804 11.082,82.621 D348.4@11.22,82.483
NetD319_1: D319.1 D349.4 | length 3.7
  Top Layer w0.09: D319.1@12.89,85.823 13.17,85.543 13.17,85.329 13.36,85.139 13.36,84.707 13.362,84.705 13.362,84.314 13.36,84.312 13.36,83.027 13.582,82.804 13.582,82.621 D349.4@13.72,82.483
NetD320_1: D320.1 D350.4 | length 3.7
  Top Layer w0.09: D320.1@15.44,85.823 15.72,85.543 15.72,85.329 15.8,85.249 15.8,84.411 15.783,84.394 15.783,84.193 15.768,84.178 15.768,83.87 15.783,83.855 15.783,83.556 15.91,83.429 15.91,83.027 16.132,82.804 16.132,82.621 D350.4@16.27,82.483
NetD321_1: D321.1 D351.4 | length 3.7
  Top Layer w0.09: D321.1@17.99,85.823 18.27,85.543 18.27,85.329 18.445,85.154 18.445,83.032 18.667,82.809 18.667,82.628 18.812,82.483 D351.4@18.82,82.483
NetD322_1: D322.1 D352.4 | length 3.7
  Top Layer w0.09: D322.1@20.533,85.823 20.813,85.543 20.813,85.329 21.003,85.139 21.003,83.179 21.01,83.172 21.01,83.117 21.232,82.894 21.232,82.614 D352.4@21.363,82.483
NetD323_1: D323.1 D353.4 | length 3.7
  Top Layer w0.09: D323.1@23.04,85.783 23.32,85.503 23.32,85.289 23.51,85.099 23.51,83.077 23.732,82.854 23.732,82.581 D353.4@23.87,82.443
NetD324_1: D324.1 D354.4 | length 3.7
  Top Layer w0.09: D324.1@25.613,85.768 25.893,85.488 25.893,85.274 26.083,85.084 26.083,83.077 26.305,82.854 26.305,82.566 D354.4@26.443,82.428
NetD325_1: D325.1 D355.4 | length 3.7
  Top Layer w0.09: D325.1@28.14,85.783 28.42,85.503 28.42,85.289 28.61,85.099 28.61,83.077 28.832,82.854 28.832,82.581 D355.4@28.97,82.443
NetD326_1: D326.1 D356.4 | length 3.7
  Top Layer w0.09: D326.1@30.64,85.783 30.777,85.645 30.777,85.431 31.11,85.099 31.11,83.132 31.11,83.077 31.332,82.854 31.332,82.581 D356.4@31.47,82.443
NetD327_1: D327.1 D357.4 | length 3.7
  Top Layer w0.09: D327.1@33.19,85.783 33.327,85.645 33.327,85.431 33.66,85.099 33.66,83.077 33.882,82.854 33.882,82.581 D357.4@34.02,82.443
NetD328_1: D328.1 D358.4 | length 3.7
  Top Layer w0.09: D328.1@35.74,85.733 36.02,85.453 36.02,85.239 36.21,85.049 36.21,83.027 36.432,82.804 36.432,82.531 D358.4@36.57,82.393
NetD329_1: D329.1 D359.4 | length 3.6
  Top Layer w0.09: D329.1@38.29,85.733 38.57,85.453 38.57,85.239 38.705,85.104 38.705,83.136 38.76,83.081 38.76,83.027 38.982,82.804 38.982,82.591 D359.4@39.12,82.453
NetD359_1: D359.1 D360.4 | length 151.1
  Top Layer w0.09: v1(-33.264,75.689) D360.4@-33.24,75.712 ; v1(-33.12,77.43) -32.271,78.279 -29.405,78.279 -29.36,78.279 -29.246,78.165 -28.992,78.165 -28.877,78.279 -28.623,78.279 -28.508,78.165 -28.254,78.165 -28.139,78.279 -27.885,78.279 -27.771,78.165 -27.517,78.165 -27.402,78.279 -27.148,78.279 -27.033,78.165 -26.779,78.165 -26.665,78.279 -26.411,78.279 -26.296,78.165 -26.042,78.165 -25.927,78.279 -25.673,78.279 -25.558,78.165 -25.304,78.165 -25.19,78.279 -24.936,78.279 -24.821,78.165 -24.567,78.165 -24.452,78.279 -24.198,78.279 -24.084,78.165 -23.83,78.165 -23.715,78.279 -23.461,78.279 -23.346,78.165 -23.092,78.165 -22.977,78.279 -22.723,78.279 -22.609,78.165 -22.355,78.165 -22.24,78.279 -21.986,78.279 -21.871,78.165 -21.617,78.165 -21.503,78.279 -21.249,78.279 -21.134,78.165 -20.88,78.165 -20.765,78.279 -20.511,78.279 -20.396,78.165 -20.142,78.165 -20.028,78.279 -19.774,78.279 -19.659,78.165 -19.405,78.165 -19.29,78.279 -19.036,78.279 -18.921,78.165 -18.667,78.165 -18.553,78.279 -18.299,78.279 -18.184,78.165 -17.93,78.165 -17.815,78.279 -17.561,78.279 -17.447,78.165 -17.193,78.165 -17.078,78.279 -16.824,78.279 -16.709,78.165 -16.455,78.165 -16.34,78.279 -16.086,78.279 -15.972,78.165 -15.718,78.165 -15.603,78.279 -15.349,78.279 -15.234,78.165 -14.98,78.165 -14.866,78.279 -14.612,78.279 -14.497,78.165 -14.243,78.165 -14.128,78.279 -13.874,78.279 -13.759,78.165 -13.505,78.165 -13.391,78.279 -13.137,78.279 -13.022,78.165 -12.768,78.165 -12.653,78.279 -12.399,78.279 -12.285,78.165 -12.031,78.165 -11.916,78.279 -11.662,78.279 -11.547,78.165 -11.293,78.165 -11.178,78.279 -10.924,78.279 -10.81,78.165 -10.556,78.165 -10.441,78.279 -10.187,78.279 -10.072,78.165 -9.818,78.165 -9.704,78.279 -9.45,78.279 -9.335,78.165 -9.081,78.165 -8.966,78.279 -8.712,78.279 -8.597,78.165 -8.343,78.165 -8.229,78.279 -7.975,78.279 -7.86,78.165 -7.606,78.165 -7.491,78.279 -7.237,78.279 -7.123,78.165 -6.869,78.165 -6.754,78.279 -6.5,78.279 -6.385,78.165 -6.131,78.165 -6.016,78.279 -5.762,78.279 -5.648,78.165 -5.394,78.165 -5.279,78.279 -5.025,78.279 -4.91,78.165 -4.656,78.165 -4.542,78.279 -4.288,78.279 -4.173,78.165 -3.919,78.165 -3.804,78.279 -3.55,78.279 -3.435,78.165 -3.181,78.165 -3.067,78.279 -2.813,78.279 -2.698,78.165 -2.444,78.165 -2.329,78.279 -2.075,78.279 -1.961,78.165 -1.707,78.165 -1.592,78.279 -1.338,78.279 -1.223,78.165 -0.969,78.165 -0.854,78.279 -0.6,78.279 -0.486,78.165 -0.232,78.165 -0.117,78.279 0.137,78.279 0.211,78.205 0.465,78.205 0.54,78.279 0.585,78.279 21.543,78.279 21.588,78.279 ccw(c21.588,78.451) 21.76,78.451 21.76,78.798 cw(c21.932,78.798) 21.932,78.97 cw(c21.932,78.798) 22.104,78.798 22.104,77.181 ccw(c22.276,77.181) 22.276,77.009 ccw(c22.276,77.181) 22.448,77.181 22.448,78.798 cw(c22.62,78.798) 22.62,78.97 cw(c22.62,78.798) 22.792,78.798 22.792,77.181 ccw(c22.964,77.181) 22.964,77.009 ccw(c22.964,77.181) 23.136,77.181 23.136,78.798 cw(c23.308,78.798) 23.308,78.97 cw(c23.308,78.798) 23.48,78.798 23.48,77.181 ccw(c23.652,77.181) 23.652,77.009 ccw(c23.652,77.181) 23.824,77.181 23.824,78.798 cw(c23.996,78.798) 23.996,78.97 cw(c23.996,78.798) 24.168,78.798 24.168,77.181 ccw(c24.34,77.181) 24.34,77.009 ccw(c24.34,77.181) 24.512,77.181 24.512,78.798 cw(c24.684,78.798) 24.684,78.97 cw(c24.684,78.798) 24.856,78.798 24.856,77.181 ccw(c25.028,77.181) 25.028,77.009 ccw(c25.028,77.181) 25.2,77.181 25.2,78.798 cw(c25.372,78.798) 25.372,78.97 cw(c25.372,78.798) 25.544,78.798 25.544,77.181 ccw(c25.716,77.181) 25.716,77.009 ccw(c25.716,77.181) 25.888,77.181 25.888,78.798 cw(c26.06,78.798) 26.06,78.97 cw(c26.06,78.798) 26.232,78.798 26.232,77.959 ccw(c26.404,77.959) 26.404,77.787 ccw(c26.404,77.959) 26.576,77.959 26.576,78.798 cw(c26.748,78.798) 26.748,78.97 cw(c26.748,78.798) 26.92,78.798 26.92,77.792 ccw(c27.092,77.792) 27.092,77.62 ccw(c27.092,77.792) 27.264,77.792 27.264,78.798 cw(c27.436,78.798) 27.436,78.97 cw(c27.436,78.798) 27.608,78.798 27.608,77.959 ccw(c27.78,77.959) 27.78,77.787 ccw(c27.78,77.959) 27.952,77.959 27.952,78.798 cw(c28.124,78.798) 28.124,78.97 cw(c28.124,78.798) 28.296,78.798 28.296,77.181 ccw(c28.468,77.181) 28.468,77.009 ccw(c28.468,77.181) 28.64,77.181 28.64,78.798 cw(c28.812,78.798) 28.812,78.97 cw(c28.812,78.798) 28.984,78.798 28.984,77.181 ccw(c29.156,77.181) 29.156,77.009 ccw(c29.156,77.181) 29.328,77.181 29.328,78.798 cw(c29.5,78.798) 29.5,78.97 cw(c29.5,78.798) 29.672,78.798 29.672,77.181 ccw(c29.844,77.181) 29.844,77.009 ccw(c29.844,77.181) 30.016,77.181 30.016,78.798 cw(c30.188,78.798) 30.188,78.97 cw(c30.188,78.798) 30.36,78.798 30.36,77.181 ccw(c30.532,77.181) 30.532,77.009 ccw(c30.532,77.181) 30.704,77.181 30.704,78.798 cw(c30.876,78.798) 30.876,78.97 cw(c30.876,78.798) 31.048,78.798 31.048,77.181 ccw(c31.22,77.181) 31.22,77.009 ccw(c31.22,77.181) 31.392,77.181 31.392,78.798 cw(c31.564,78.798) 31.564,78.97 cw(c31.564,78.798) 31.736,78.798 31.736,77.181 ccw(c31.908,77.181) 31.908,77.009 ccw(c31.908,77.181) 32.08,77.181 32.08,78.798 cw(c32.252,78.798) 32.252,78.97 cw(c32.252,78.798) 32.424,78.798 32.424,77.181 ccw(c32.596,77.181) 32.596,77.009 ccw(c32.596,77.181) 32.768,77.181 32.768,78.798 cw(c32.94,78.798) 32.94,78.97 cw(c32.94,78.798) 33.112,78.798 33.112,77.181 ccw(c33.284,77.181) 33.284,77.009 ccw(c33.284,77.181) 33.456,77.181 33.456,78.798 cw(c33.628,78.798) 33.628,78.97 cw(c33.628,78.798) 33.8,78.798 33.8,77.181 ccw(c33.972,77.181) 33.972,77.009 ccw(c33.972,77.181) 34.144,77.181 34.144,78.798 cw(c34.316,78.798) 34.316,78.97 cw(c34.316,78.798) 34.488,78.798 34.488,78.451 ccw(c34.66,78.451) 34.66,78.279 35.025,78.279 39.294,78.279 39.387,78.372 39.419,78.404 ccw(c39.297,78.526) 39.419,78.647 38.817,79.249 cw(c38.939,79.371) 38.817,79.492 cw(c38.939,79.371) 39.06,79.492 40.162,78.391 ccw(c40.283,78.513) 40.405,78.391 ccw(c40.283,78.513) 40.405,78.634 39.485,79.554 cw(c39.607,79.676) 39.485,79.797 cw(c39.607,79.676) 39.728,79.797 39.831,79.694 ccw(c39.953,79.816) 40.125,79.816 40.125,80.135 40.125,80.235 38.76,81.6 38.76,82.637 38.57,82.827 38.57,83.003 D359.1@38.29,83.283
  Int3 (Sign) w0.09: v1(-33.264,75.689) -33.264,76.458 -33.12,76.601 v1(-33.12,77.43)
NetD360_1: D360.1 D361.4 | length 3.7
  Top Layer w0.09: D360.1@-34.073,74.886 -33.658,75.301 -31.187,75.301 -30.937,75.551 -30.778,75.551 D361.4@-30.702,75.626
NetD361_1: D361.1 D362.4 | length 3.6
  Top Layer w0.09: D361.1@-31.51,74.886 -31.34,75.056 -31.163,75.056 -30.947,75.272 -28.751,75.272 -28.477,75.546 -28.227,75.546 D362.4@-28.168,75.606
NetD362_1: D362.1 D363.4 | length 3.6
  Top Layer w0.09: D362.1@-28.96,74.886 -28.79,75.056 -28.613,75.056 -28.374,75.296 -26.167,75.296 -25.927,75.536 -25.729,75.536 D363.4@-25.636,75.629
NetD363_1: D363.1 D364.4 | length 3.6
  Top Layer w0.09: D363.1@-26.41,74.876 -26.258,75.027 -26.107,75.027 -25.844,75.291 -23.741,75.291 -23.669,75.363 -23.614,75.363 -23.424,75.553 -23.171,75.553 D364.4@-23.149,75.574
NetD364_1: D364.1 D389.4 | length 3.9
  Top Layer w0.09: D364.1@-23.87,74.893 -23.59,75.173 -23.377,75.173 -23.297,75.253 -22.763,75.253 -22.68,75.17 -22.68,73.481 -23.051,73.11 -23.051,73.079 D389.4@-23.221,72.909
NetD365_1: D365.1 D366.4 | length 3.6
  Top Layer w0.09: D365.1@-18.71,75.019 -18.686,75.043 -18.439,75.043 -18.386,75.096 -18.386,75.152 -18.282,75.256 -17.176,75.256 -17.174,75.253 -16.067,75.253 -15.677,75.643 D366.4@-15.395,75.643
NetD366_1: D366.1 D367.4 | length 3.6
  Top Layer w0.09: D366.1@-16.16,74.983 -16.16,75.053 -16.15,75.063 -15.989,75.063 -15.899,75.153 -15.847,75.153 -15.747,75.253 -13.667,75.253 -13.557,75.363 -13.514,75.363 -13.41,75.467 -13.41,75.51 -13.277,75.643 -13.092,75.643 D367.4@-12.985,75.75
NetD367_1: D367.1 D368.4 | length 3.7
  Top Layer w0.09: D367.1@-13.76,74.983 -13.68,75.063 -13.387,75.063 -13.197,75.253 -12.165,75.253 -12.157,75.245 -11.125,75.245 -11.015,75.355 -10.929,75.355 -10.825,75.459 -10.825,75.545 -10.727,75.643 -10.53,75.643 D368.4@-10.418,75.755
NetD368_1: D368.1 D369.4 | length 3.6
  Top Layer w0.09: D368.1@-11.087,74.983 -10.905,75.165 -10.691,75.165 -10.528,75.328 -8.406,75.328 -8.172,75.562 -7.99,75.562 -7.824,75.728 D369.4@-7.824,75.735
NetD369_1: D369.1 D394.4 | length 3.5
  Top Layer w0.127: D369.1@-8.66,74.983 -8.622,75.022 -8.311,75.022 -8.084,75.249 -7.556,75.249 -7.426,75.118 -7.426,73.627 D394.4@-7.83,73.223
NetD370_1: D370.1 D371.4 | length 3.7
  Top Layer w0.127: D370.1@-3.629,74.887 -3.477,75.039 -3.29,75.039 -3.036,75.293 -0.894,75.293 -0.641,75.546 -0.453,75.546 D371.4@-0.302,75.698
NetD371_1: D371.1 D372.4 | length 3.8
  Top Layer w0.127: D371.1@-1.132,74.868 -0.98,75.019 -0.793,75.019 -0.528,75.284 1.701,75.284 1.966,75.549 2.154,75.549 D372.4@2.305,75.7
NetD372_1: D372.1 D373.4 | length 3.7
  Top Layer w0.127: D372.1@1.475,74.87 1.627,75.022 1.814,75.022 2.08,75.287 4.155,75.287 4.388,75.52 4.576,75.52 D373.4@4.794,75.739
NetD373_1: D373.1 D374.4 | length 3.8
  Top Layer w0.127: D373.1@3.964,74.909 4.115,75.06 4.303,75.06 4.536,75.293 6.275,75.293 6.318,75.337 6.773,75.337 7.05,75.614 7.238,75.614 D374.4@7.389,75.766
NetD374_1: D374.1 D399.4 | length 3.6
  Top Layer w0.127: D374.1@6.559,74.936 6.711,75.087 6.899,75.087 7.126,75.314 7.653,75.314 7.83,75.138 7.83,73.726 D399.4@7.35,73.246
NetD375_1: D375.1 D376.4 | length 3.7
  Top Layer w0.127: D375.1@11.576,74.841 11.728,74.992 11.915,74.992 12.179,75.256 14.324,75.256 14.587,75.519 14.775,75.519 D376.4@14.927,75.671
NetD376_1: D376.1 D377.4 | length 3.8
  Top Layer w0.127: D376.1@14.096,74.841 14.248,74.992 14.436,74.992 14.699,75.256 16.928,75.256 17.206,75.534 17.394,75.534 D377.4@17.545,75.685
NetD377_1: D377.1 D378.4 | length 3.6
  Top Layer w0.127: D377.1@16.715,74.855 16.867,75.007 17.054,75.007 17.303,75.256 19.358,75.256 19.651,75.549 19.839,75.549 D378.4@19.99,75.7
NetD378_1: D378.1 D379.4 | length 3.8
  Top Layer w0.127: D378.1@19.16,74.87 19.312,75.022 19.499,75.022 19.748,75.27 21.999,75.27 22.248,75.519 22.435,75.519 D379.4@22.587,75.671
NetD379_1: D379.1 D404.4 | length 3.3
  Top Layer w0.127: D379.1@21.757,74.841 21.908,74.992 22.096,74.992 22.323,75.219 22.851,75.219 22.965,75.105 22.965,73.668 D404.4@22.62,73.323
NetD380_1: D380.1 D381.4 | length 3.6
  Top Layer w0.09: D380.1@27.043,75.068 27.224,75.068 27.335,75.18 27.446,75.291 28.019,75.291 29.702,75.291 29.87,75.459 29.87,75.49 30.073,75.693 D381.4@30.355,75.693
NetD381_1: D381.1 D382.4 | length 3.6
  Top Layer w0.09: D381.1@29.51,74.885 29.648,75.023 29.862,75.023 30.09,75.251 32.083,75.251 32.171,75.34 32.226,75.34 32.448,75.562 32.662,75.562 D382.4@32.8,75.7
NetD382_1: D382.1 D383.4 | length 3.6
  Top Layer w0.09: D382.1@31.97,74.87 32.25,75.15 32.464,75.15 32.584,75.27 34.591,75.27 34.631,75.31 34.686,75.31 34.831,75.454 35.044,75.454 D383.4@35.26,75.67
NetD383_1: D383.1 D384.4 | length 3.7
  Top Layer w0.09: D383.1@34.43,74.84 34.71,75.12 34.924,75.12 35.068,75.264 37.104,75.264 37.418,75.578 37.632,75.578 D384.4@37.77,75.716
NetD384_1: D384.1 D409.4 | length 3.5
  Top Layer w0.127: D384.1@37.09,75.033 37.09,75.036 37.091,75.037 37.279,75.037 37.549,75.307 38.25,75.307 38.324,75.233 38.324,73.677 D409.4@37.92,73.273
NetD385_3: D385.4 D386.1 | length 2.1
  Top Layer w0.127: D385.4@-33.281,73.092 -32.401,73.092 D386.1@-31.56,72.251
NetD386_3: D386.4 D387.1 | length 2.1
  Top Layer w0.09: D386.4@-30.73,73.081 -29.798,73.081 D387.1@-28.96,72.243
NetD387_3: D387.4 D388.1 | length 2.1
  Top Layer w0.09: D387.4@-28.13,73.073 -27.24,73.073 D388.1@-26.41,72.243
NetD388_3: D388.4 D389.1 | length 2
  Top Layer w0.09: D388.4@-25.58,73.073 -24.732,73.073 D389.1@-23.91,72.251